# Altium PCB main board_PCB.PcbDoc
Units mil, origin at the board's own origin, x right, y up, seen from the top; angles counter-clockwise.
Board outline 5314.96 x 2480.31 mil, 2 copper layers (Top Layer, Bottom Layer); 89 components, 121 nets, 602 pads, 57 vias.
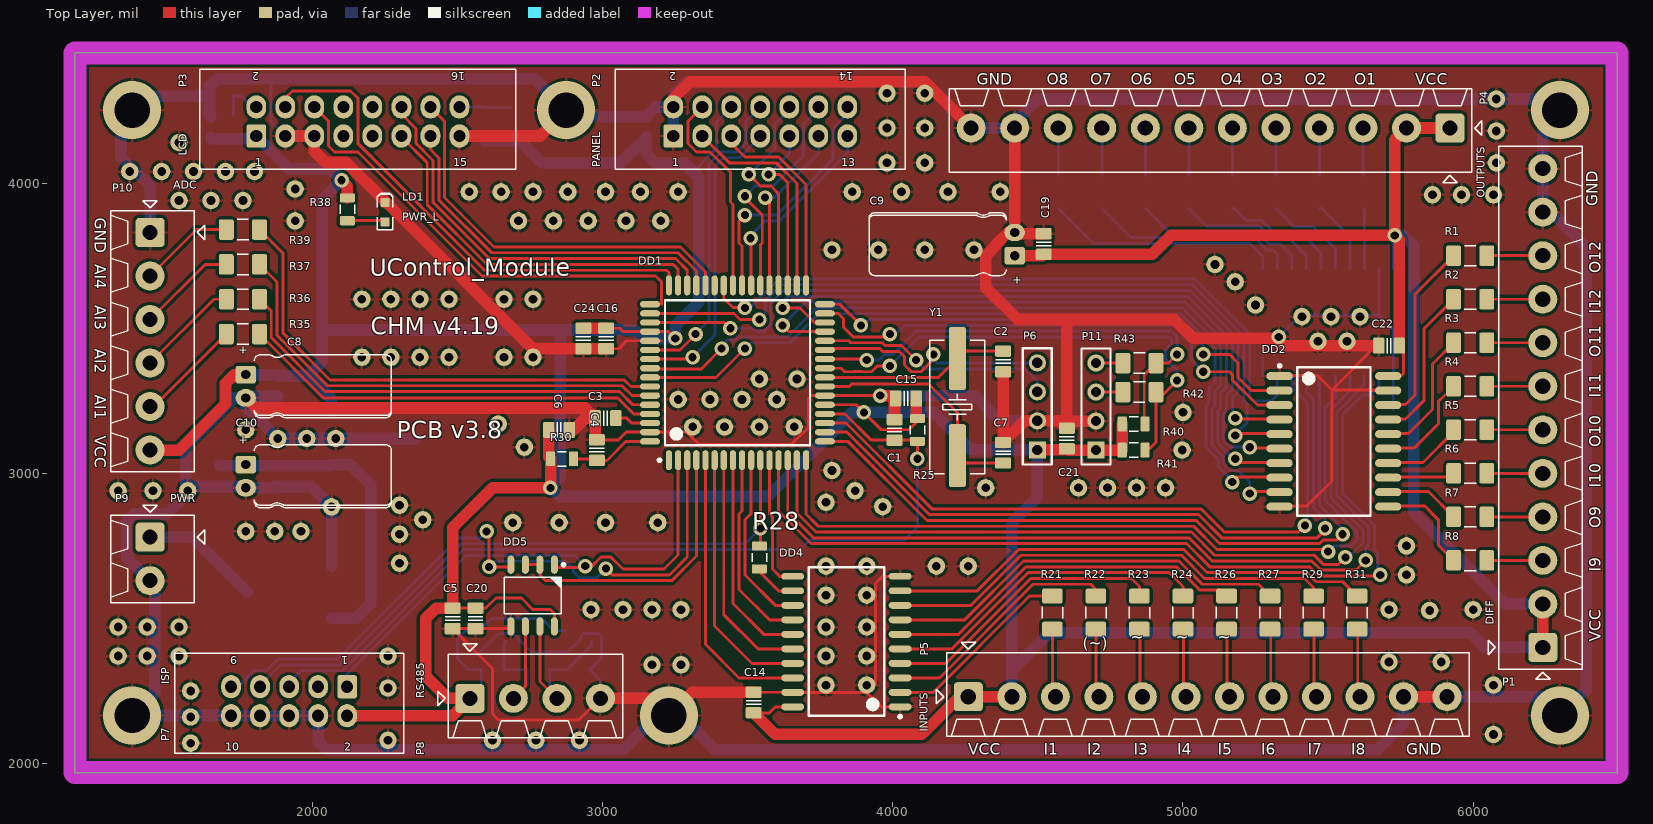
[diagram p0: Top Layer view]
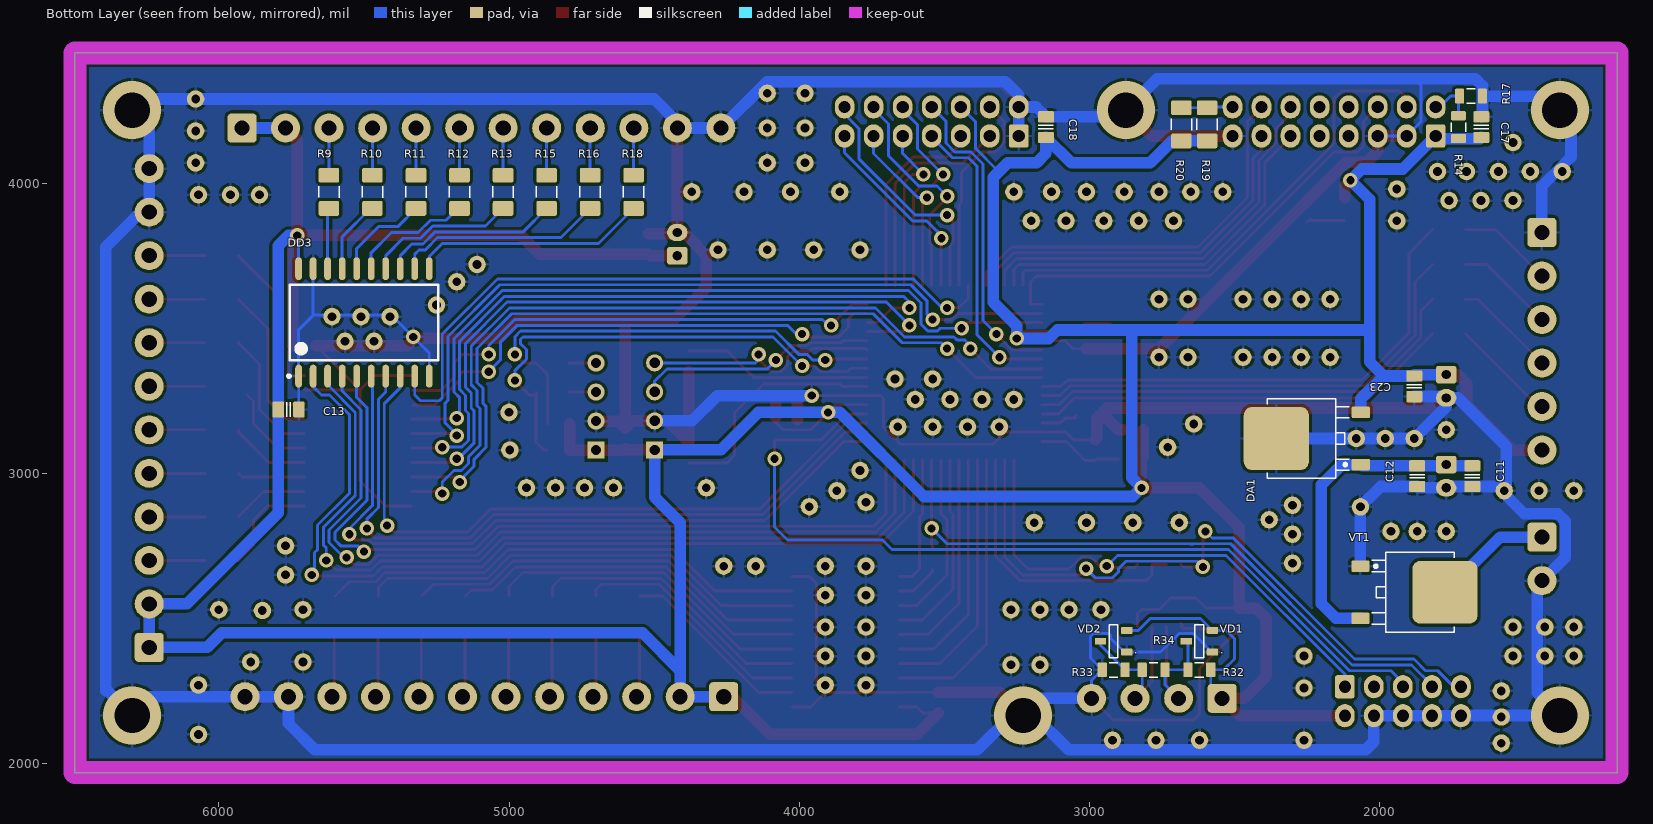
[diagram p1: Bottom Layer view, seen from below]

## Layer stack, top to bottom
Top Solder: solder mask 0.4, Solder Resist, Dk 3.5
Top Layer: signal copper 1.4
Dielectric1: dielectric 12.6, FR-4, Dk 4.8
Bottom Layer: signal copper 1.4
Bottom Solder: solder mask 0.4, Solder Resist, Dk 3.5

## Board outline
1181.1,1968.5 1181.1,4448.82 6496.06,4448.82 6496.06,1968.5

## Design rules (kind name [scope] priority, off if disabled: settings)
Clearance [All] p1: gap=10
PolygonConnect [All] p1: connectstyle=Relief reliefconductorwidth=10 reliefentries=4 polygonreliefangle="90 Angle" airgapwidth=10
RoutingVias [All] p1: holewidth=28 width=50 viastyle="Through Hole" minholewidth=28 minwidth=50 maxholewidth=28 maxwidth=50
SilkToSolderMaskClearance SilkscreenOverComponentPads [IsPad] p1: minsilkscreentomaskgap=10 clearancetoexposedcopper=TRUE
SolderMaskExpansion [All] p1: expansion=4
Width "Schematic Width Constraint_2" [InNet('NetP9_1')] p1: maxlimit=40 minlimit=10 preferedwidth=40
Width "Schematic Width Constraint_1" [InNet('GND')] p2: maxlimit=40 minlimit=10 preferedwidth=40
Width "Schematic Width Constraint" [InNet('VCC+12V')] p3: maxlimit=40 minlimit=10 preferedwidth=40
Width "Schematic Width Constraint_3" [InNet('VCC')] p4: maxlimit=40 minlimit=10 preferedwidth=40
Width [All] p5: maxlimit=10 minlimit=10 preferedwidth=10
29 further rules are at their usual default settings.

## Components (designator, comment, footprint, x,y, rotation, side; value= is the part's Value field where it differs from the comment)
C1 "C0805" CAPC2012X135N 4005.91,3149.61 r270 top
C2 "C0805" CAPC2012X135N 4379.92,3385.83 r90 top
C3 "C0805" CAPC2012X135N 3010,3190 r0 top
C4 "C0805" CAPC2012X135N 2980,3080 r270 top
C5 "C0805" CAPC2012X135N 2483.07,2500 r90 top
C6 "C0805" CAPC2012X135N 2850,3150 r180 top
C7 "C0805" CAPC2012X135N 4379.92,3070.87 r270 top
C8 "Cap Pol1" CAPAE200P550X1200_FLAT1 1770,3300 r270 top
C9 "Cap Pol1" CAPAE200P550X1200_FLAT1 4420,3790 r90 top
C10 "Cap Pol1" CAPAE200P550X1200_FLAT1 1770,2990 r270 top
C11 "C0805" CAPC2012X135N 1680,2990 r90 bottom
C12 "C0805" CAPC2012X135N 1870,2990 r90 bottom
C13 "C0805" CAPC2012X135N 5760,3220 r0 bottom
C14 "C0805" CAPC2012X135N 3520,2210 r270 top
C15 "C0805" CAPC2012X135N 4045.28,3257.87 r0 top
C16 "C0805" CAPC2012X135N 3011.81,3464.57 r90 top
C17 "C0805" CAPC2012X135N 1649.13,4192.91 r270 bottom
C18 "C0805" CAPC2012X135N 3149.61,4192.91 r270 bottom
C19 "C0805" CAPC2012X135N 4520,3790 r270 top
C20 "C0805" CAPC2012X135N 2561.81,2500 r90 top
C21 "C0805" CAPC2012X135N 4600,3120 r270 top
C22 "C0805" CAPC2012X135N 5710,3440 r0 top
C23 "C0805" CAPC2012X135N 1880,3300 r90 bottom
C24 "C0805" CAPC2012X135N 2933.07,3464.57 r90 top
DA1 "MC7805CD2TR4G" TO-252 2210,3120 r90 bottom
DD1 "ATmega128A-AU" 64A_N 3464.57,3346.46 r90 top
DD2 "MC74VHCT244ADT" 751D-04_M 5520,3110 r0 top
DD3 "MC74HC541ADW" 751D-05_N 5500,3520 r90 bottom
DD4 "MC74HC541ADW" 751D-05_N 3840,2420 r180 top
DD5 "MAX485" SOIC127P600X175-8AN 2758.66,2578.74 r270 top
LD1 "PWR_L" LED-0603-BLUE 2250,3900 r90 top
P1 "DIFF" 12P_PCB_ScrewTerm_90S_3.81MM 6240,2400 r0 top
P2 "PANEL" 14P_PCB_HEADER_BRD_MNT 3543.31,4212.6 r90 top
P3 "LCD" 16P_PCB_HEADER_BRD_MNT 2156.22,4212.6 r90 top
P4 "OUTPUTS" 12P_PCB_ScrewTerm_90S_3.81MM 5920,4190 r90 top
P5 "INPUTS" 12P_PCB_ScrewTerm_90S_3.81MM 4260,2230 r270 top
P6 "DEBUG" HDR1X4 4498.03,3080.71 r90 top
P7 "ISP" 10P_PCB_HEADER_BRD_MNT 1919.29,2214.57 r270 top
P8 "RS485" 4P_PCB_ScrewTerm_90S_3.81MM 2542.13,2224.41 r270 top
P9 "PWR" 2P_PCB_ScrewTerm_90S_3.81MM 1440,2780 r180 top
P10 "ADC" 6P_PCB_ScrewTerm_90S_3.81MM 1440,3830 r180 top
P11 "INT/I2C" HDR1X4 4700,3080 r90 top
R1 "Res2" RESC3216X70N 5990,3750 r0 top
R2 "Res2" RESC3216X70N 5990,3600 r0 top
R3 "Res2" RESC3216X70N 5990,3450 r0 top
R4 "Res2" RESC3216X70N 5990,3300 r0 top
R5 "Res2" RESC3216X70N 5990,3150 r0 top
R6 "Res2" RESC3216X70N 5990,3000 r0 top
R7 "Res2" RESC3216X70N 5990,2850 r0 top
R8 "Res2" RESC3216X70N 5990,2700 r0 top
R9 "Res2" RESC3216X70N 5620.63,3970 r90 bottom
R10 "Res2" RESC3216X70N 5470.63,3970 r90 bottom
R11 "Res2" RESC3216X70N 5320.63,3970 r90 bottom
R12 "Res2" RESC3216X70N 5170.63,3970 r90 bottom
R13 "Res2" RESC3216X70N 5020.63,3970 r90 bottom
R14 "Res2" RESC2012X70N 1727.87,4192.91 r90 bottom
R15 "Res2" RESC3216X70N 4870.63,3970 r90 bottom
R16 "Res2" RESC3216X70N 4720.63,3970 r90 bottom
R17 "Res2" RESC2012X70N 1684.41,4300 r0 bottom
R18 "Res2" RESC3216X70N 4570.63,3970 r90 bottom
R19 "Res2" RESC3216X70N 2594.02,4202.76 r90 bottom
R20 "Res2" RESC3216X70N 2682.6,4202.76 r90 bottom
R21 "Res2" RESC3216X70N 4550,2520 r270 top
R22 "Res2" RESC3216X70N 4700,2520 r270 top
R23 "Res2" RESC3216X70N 4850,2520 r270 top
R24 "Res2" RESC3216X70N 5000,2520 r270 top
R25 "Res2" RESC2012X70N 4084.65,3149.61 r270 top
R26 "Res2" RESC3216X70N 5150,2520 r270 top
R27 "Res2" RESC3216X70N 5300,2520 r270 top
R28 "Res2" RESC2012X70N 3540,2710 r270 top
R29 "Res2" RESC3216X70N 5450,2520 r270 top
R30 "Res2" RESC2012X70N 2860,3050 r180 top
R31 "Res2" RESC3216X70N 5600,2520 r270 top
R32 "Res2" RESC2012X70N 2620.87,2322.83 r180 bottom
R33 "Res2" RESC2012X70N 2916.14,2322.83 r180 bottom
R34 "Res2" RESC2012X70N 2778.35,2322.83 r0 bottom
R35 "Res2" RESC3216X70N 1760,3480 r0 top
R36 "Res2" RESC3216X70N 1760,3600 r0 top
R37 "Res2" RESC3216X70N 1760,3720 r0 top
R38 "Res2" RESC2012X70N 2120,3910 r90 top
R39 "Res2" RESC3216X70N 1760,3840 r0 top
R40 "Res2" RESC2012X70N 4830,3170 r180 top
R41 "Res2" RESC2012X70N 4830,3080 r180 top
R42 "Res2" RESC3216X70N 4850,3280 r180 top
R43 "Res2" RESC3216X70N 4850,3380 r180 top
VD1 "BAV99" SOT23-3 2620.87,2421.26 r0 bottom
VD2 "BAV99" SOT23-3 2916.14,2421.26 r0 bottom
VT1 "IRFU5505" TO-252 1920,2590 r270 bottom
Y1 "HC49/4H_SMX" CRYSTAL_HC49-US-SM 4222.44,3228.35 r90 top

## Footprints (in the part's own frame and the unit in brackets; to place one, negate y for a bottom-side part, rotate by r counter-clockwise, add the part's x,y. Pads: shape width x height; smd on the part's side, far side on the other; paste and mask are expansions set on the pad)
2P_PCB_ScrewTerm_90S_3.81MM [mil] "TERM BLOCK 2POS SIDE ENT STACKABLE 3.81MM"
  rrect25% 100x100 hole 52: 1(0,0)
  round 100 hole 52: 2(0,150)
  silkscreen extent -188,-110 136,226, body extent -152,-75 136,225, height 335
4P_PCB_ScrewTerm_90S_3.81MM [mil]
  rrect25% 100x100 hole 52: 1(0,0)
  round 100 hole 52: 2(0,150) 3(0,300) 4(0,450)
  silkscreen extent -188,-110 136,526, body extent -152,-75 136,525, height 335
6P_PCB_ScrewTerm_90S_3.81MM [mil] "TERM BLOCK 6POS SIDE ENT STACKABLE 3.81MM"
  rrect25% 100x100 hole 52: 1(0,0)
  round 100 hole 52: 2(0,150) 3(0,300) 4(0,450) 5(0,600) 6(0,750)
  silkscreen extent -188,-110 136,825, body extent -152,-75 136,825, height 335
10P_PCB_HEADER_BRD_MNT [mil] "HEADER BRD MNT 10POS 2.54MM"
  round 40 on Mech15: 0(0,0)
  rrect25% 80x68 hole 42: 1(-50,200)
  oval 80x68 hole 42: 2(50,200) 3(-50,100) 4(50,100) 5(-50,0) 6(50,0) 7(-50,-100) 8(50,-100) 9(-50,-200) 10(50,-200)
  silkscreen extent -165,-395 180,395, body extent -162,-394 178,394, height 390
12P_PCB_ScrewTerm_90S_3.81MM [mil]
  rrect25% 100x100 hole 52: 1(0,0)
  round 100 hole 52: 2(0,150) 3(0,300) 4(0,450) 5(0,600) 6(0,750) 7(0,900) 8(0,1050) 9(0,1200) 10(0,1350) 11(0,1500) 12(0,1650)
  silkscreen extent -188,-110 136,1726, body extent -152,-75 139,1725, height 335
14P_PCB_HEADER_BRD_MNT [mil] "HEADER BRD MNT 14POS 2.54MM"
  round 40 on Mech15: 0(0,0)
  rrect25% 80x68 hole 42: 1(-50,300)
  oval 80x68 hole 42: 2(50,300) 3(-50,200) 4(50,200) 5(-50,100) 6(50,100) 7(-50,0) 8(50,0) 9(-50,-100) 10(50,-100) 11(-50,-200) 12(50,-200) 13(-50,-300) 14(50,-300)
  silkscreen extent -165,-500 180,500, body extent -162,-494 178,494, height 390
16P_PCB_HEADER_BRD_MNT [mil] "HEADER BRD MNT 16POS 2.54MM"
  round 40 on Mech15: 0(0,0)
  rrect25% 80x68 hole 42: 1(-50,350)
  oval 80x68 hole 42: 2(50,350) 3(-50,250) 4(50,250) 5(-50,150) 6(50,150) 7(-50,50) 8(50,50) 9(-50,-50) 10(50,-50) 11(-50,-150) 12(50,-150) 13(-50,-250) 14(50,-250) 15(-50,-350) 16(50,-350)
  silkscreen extent -165,-545 180,545, body extent -162,-544 178,544, height 390
64A_N [mm] "Thin QFP, 64-Leads, Body 14x14mm, Pitch 0.8mm, IPC Medium Density"
  oval 1.75x0.55 smd: 1(-7.65,6) 2(-7.65,5.2) 3(-7.65,4.4) 4(-7.65,3.6) 5(-7.65,2.8) 6(-7.65,2) 7(-7.65,1.2) 8(-7.65,0.4) 9(-7.65,-0.4) 10(-7.65,-1.2) 11(-7.65,-2) 12(-7.65,-2.8) 13(-7.65,-3.6) 14(-7.65,-4.4) 15(-7.65,-5.2) 16(-7.65,-6) 33(7.65,-6) 34(7.65,-5.2) 35(7.65,-4.4) 36(7.65,-3.6) 37(7.65,-2.8) 38(7.65,-2) 39(7.65,-1.2) 40(7.65,-0.4) 41(7.65,0.4) 42(7.65,1.2) 43(7.65,2) 44(7.65,2.8) 45(7.65,3.6) 46(7.65,4.4) 47(7.65,5.2) 48(7.65,6)
  oval 0.55x1.75 smd: 17(-6,-7.65) 18(-5.2,-7.65) 19(-4.4,-7.65) 20(-3.6,-7.65) 21(-2.8,-7.65) 22(-2,-7.65) 23(-1.2,-7.65) 24(-0.4,-7.65) 25(0.4,-7.65) 26(1.2,-7.65) 27(2,-7.65) 28(2.8,-7.65) 29(3.6,-7.65) 30(4.4,-7.65) 31(5.2,-7.65) 32(6,-7.65) 49(6,7.65) 50(5.2,7.65) 51(4.4,7.65) 52(3.6,7.65) 53(2.8,7.65) 54(2,7.65) 55(1.2,7.65) 56(0.4,7.65) 57(-0.4,7.65) 58(-1.2,7.65) 59(-2,7.65) 60(-2.8,7.65) 61(-3.6,7.65) 62(-4.4,7.65) 63(-5.2,7.65) 64(-6,7.65)
  silkscreen extent -7.77,-6.35 6.35,6.95, body extent -7,-7 7,7, height 1.2
751D-04_M [mm] "SOIC, 20-Leads, Body 12.8x7.5mm, Pitch 1.27mm, IPC Low Density"
  oval 2.3x0.7 smd: 1(-4.75,5.715) 2(-4.75,4.445) 3(-4.75,3.175) 4(-4.75,1.905) 5(-4.75,0.635) 6(-4.75,-0.635) 7(-4.75,-1.905) 8(-4.75,-3.175) 9(-4.75,-4.445) 10(-4.75,-5.715) 11(4.75,-5.715) 12(4.75,-4.445) 13(4.75,-3.175) 14(4.75,-1.905) 15(4.75,-0.635) 16(4.75,0.635) 17(4.75,1.905) 18(4.75,3.175) 19(4.75,4.445) 20(4.75,5.715)
  silkscreen extent -4.87,-6.5 3.2,6.74, body extent -3.8,-6.5 3.8,6.5, height 2.65
751D-05_N [mm] "SOIC, 20-Leads, Body 12.8x7.5mm, Pitch 1.27mm, IPC Medium Density"
  oval 2x0.6 smd: 1(-4.7,5.715) 2(-4.7,4.445) 3(-4.7,3.175) 4(-4.7,1.905) 5(-4.7,0.635) 6(-4.7,-0.635) 7(-4.7,-1.905) 8(-4.7,-3.175) 9(-4.7,-4.445) 10(-4.7,-5.715) 11(4.7,-5.715) 12(4.7,-4.445) 13(4.7,-3.175) 14(4.7,-1.905) 15(4.7,-0.635) 16(4.7,0.635) 17(4.7,1.905) 18(4.7,3.175) 19(4.7,4.445) 20(4.7,5.715)
  silkscreen extent -4.82,-6.5 3.3,6.69, body extent -3.8,-6.5 3.8,6.5, height 2.65
CAPAE200P550X1200_FLAT1 [mil]
  round 20 on Mech15: 0(0,0)
  rrect25% 60x70 hole 31.5: 1(-40,0)
  oval 60x70 hole 31.5: 2(40,0)
  silkscreen extent -108,30 108,502, body extent -107,-10 107,502, height 216
CAPC2012X135N [mm] "Chip Capacitor, Body 2.0x1.2mm, EIA 0805, IPC Medium Density"
  round 0.254 on Mech15: 0(0,0)
  rrect25% 1x1.4 smd: 1(-0.9,0) 2(0.9,0)
  Top Layer pour cut-out: -0.675,0.7 -0.475,0.9 0.475,0.9 0.675,0.7 0.675,-0.7 0.475,-0.9 -0.475,-0.9 -0.675,-0.7
  silkscreen extent -0.15,-0.65 0.15,0.65, body extent -1.1,-0.72 1.1,0.73, height 1.34
CRYSTAL_HC49-US-SM [mm] "SMD Crystal HC49/US-SM package"
  round 0.508 on Mech15: 0(0,0)
  rrect25% 5.5x1.5 smd: 1(-4.25,0) 2(4.25,0)
  silkscreen extent -5.84,-2.41 5.84,2.41, body extent -6.4,-2.41 6.4,2.42, height 4.29
HDR1X4 [mm] "Connector; Header; 4 Position"
  rect 1.5x1.5 hole 0.9: 1(0,0)
  round 1.5 hole 0.9: 2(2.54,0) 3(5.08,0) 4(7.62,0)
  silkscreen extent -1.27,-1.27 8.89,1.27
LED-0603-BLUE [mm]
  round 0.254 on Mech15: 0(0,0)
  rrect25% 0.8x0.8 smd: A(-0.85,0) K(0.85,0)
  Top Layer pour cut-out: -0.5,0.5 0.5,0.5 0.5,-0.5 -0.5,-0.5
  silkscreen extent -1.55,-0.67 1.68,0.67, body extent -0.8,-0.4 0.8,0.4, height 0.75
RESC2012X70N [mm] "Chip Resistor, Body 2.0x1.2mm, EIA 0805, IPC Medium Density"
  round 0.254 on Mech15: 0(0,0)
  rrect25% 0.8x1.3 smd: 1(-1,0) 2(1,0)
  Top Layer pour cut-out: -0.725,0.65 -0.525,0.85 0.525,0.85 0.725,0.65 0.725,-0.65 0.525,-0.85 -0.525,-0.85 -0.725,-0.65
  silkscreen extent -0.38,-0.64 0.38,0.64, body extent -1.1,-0.67 1.1,0.68, height 0.69
RESC3216X70N [mm] "Chip Resistor, Body 3.2x1.6mm, EIA 1206, IPC Medium Density"
  round 0.508 on Mech15: 0(0,0)
  rrect25% 1.3x1.8 smd: 1(-1.45,0) 2(1.45,0)
  silkscreen extent -0.51,-0.89 0.51,0.89, body extent -1.62,-0.82 1.63,0.83, height 0.69
SOIC127P600X175-8AN [mm] "SOIC, 8-Leads, Body 4.9x3.9mm, Pitch 1.27mm, IPC Medium Density"
  round 1 on Mech15: 0(0,0)
  oval 1.6x0.6 smd: 1(-2.7,1.905) 2(-2.7,0.635) 3(-2.7,-0.635) 4(-2.7,-1.905) 5(2.7,-1.905) 6(2.7,-0.635) 7(2.7,0.635) 8(2.7,1.905)
  silkscreen extent -2.82,-2.5 1.6,2.83, body extent -3,-2.45 3,2.45, height 1.75
SOT23-3 [mm] "SOT23, 3 pin"
  round 0.5 on Mech15: 0(0,0)
  rrect25% 1x0.6 smd: 1(-1.15,0.95) 2(-1.15,-0.95) 3(1.15,0)
  silkscreen extent -0.38,-1.45 0.38,1.45, body extent -1.4,-1.45 1.4,1.45, height 1.29
TO-252 [mm] "D-PAK/TO-252-AA; 3 Leads (1 Cropped); Body 10.3 (inc. leads) x 6.7 mm (LxW max)"
  round 0.5 on Mech15: 0(0,0)
  rrect25% 1x1.6 smd: 1(-2.285,-3.7) 3(2.285,-3.7)
  rrect25% 5.5x5.7 smd: 4(0,3.7)
  silkscreen extent -3.5,-2.7 3.5,4.5, body extent -3.3,-3.95 3.3,5.76, height 2.31

## Part data
C1 C2 C3 C4 C5 C6 C7 C11 C12 C13 C14 C15 C16 C17 C18 C19 C20 C21 C22 C23 C24: "Ceramic Chip Capacitor - Standard"
C8 C9 C10: "Polarized Capacitor (Radial)"
DA1: library part µA78M05CKTPR, "Positive-Voltage Regulator"
DD1: "8-bit AVR Microcontroller, 128KB Flash, 4KB EEPROM, 4KB SRAM, 64-pin TQFP, Industrial Grade (-40°C to 85°C)"
DD2: "vit"
DD3 DD4: "Octal 3-State Non-Inverting Buffer/Line Driver/Line Receiver"
DD5: library part ST485
LD1: library part LED, "APT1608QBC/D"
P1 P4 P5: library part "Header 12", "Header, 12-Pin"
P2: library part "Header 14", "Header, 14-Pin"
P3: library part "Header 16", "Header, 16-Pin"
P6 P11: library part "Header 4", "Header, 4-Pin"
P7: library part "Header 5X2", "Header, 5-Pin, Dual row"
P8: library part MHDR1X4, "Header, 4-Pin"
P9: library part "Header 2H", "Header, 2-Pin, Right Angle"
P10: library part "Header 6", "Header, 6-Pin"
R1 R2 R3 R4 R5 R6 R7 R8 R9 R10 R11 R12 R13 R14 R15 R16 R17 R18 R19 R20 R21 R22 R23 R24 R25 R26 R27 R28 R29 R30 R31 R32 R33 R34 R35 R36 R37 R38 R39 R40 R41 R42 R43: "Resistor"
VD1 VD2: "Silicon Switching Diode Array for High-Speed Switching"
VT1: "HEXFET Power MOSFET"
Y1: "Surface Mount Quartz Crystal"

## Free pads (board coordinates)
  round 60 hole 30: 1(3260,3970) 2(2880,3970) 3(3010,3970) 4(3130,3970) 5(3860,3970) 6(4030,3970) 7(4190,3970) 8(4370,3970) 9(3790,3770) 10(3950,3770) 11(4110,3770) 12(4280,3770) 13(5410,3540) 14(5510,3540) 15(5610,3540) 16(5860,3960) 17(5960,3960) 18(6070,3960) 19(4320,2950) 20(4640,2950) 21(4740,2950) 22(4840,2950) 23(4940,2950) 25(5000,3210) 26(4997.05,3080.04) 28(5710,2530) 29(5850.04,2527.05) 31(6000,2530) 32(5770,2750) 33(5770,2650) 34(5710,2350) 36(5890,2350) 37(6070,2100) 38(2960,2530) 39(3070,2530) 40(3170,2530) 41(3270,2530) 43(3270,2340) 44(3170,2340) 47(3190,2830) 49(3010,2830) 51(2850,2830) 53(2690,2830) 55(2730,3090) 56(2640,3170) 58(2260,2260) 59(2260,2370) 61(2300,2690) 62(2300,2790) 63(2300,2890) 64(2380,2840) 66(2760,3400) 67(2660,3400) 69(2470,3400) 70(2370,3400) 71(2270,3400) 72(2170,3400) 73(2760,3600) 74(2660,3600) 76(2470,3600) 77(2370,3600) 78(2270,3600) 79(2170,3600) 80(1940,3980) 81(1940,3870) 83(1800,4040) 84(1700,4040) 85(1590,4040) 86(1480,4040) 87(1370,4040) 88(1540,4140) 89(1540,3940) 90(1650,3940) 91(1760,3940) 92(2760,3970) 93(2650,3970) 94(2710,3870) 95(2830,3870) 96(2950,3870) 97(3080,3870) 98(3200,3870) 100(1960,2800) 101(1870,2800) 102(1770,2800) 104(1330,2470) 105(1430,2470) 106(1540,2470) 107(1330,2370) 108(1430,2370) 109(1540,2370) 110(1580,2070) 111(1580,2160) 112(1580,2250) 113(2260,2080) 114(2620,2080) 115(2770,2080) 116(2920,2080) 117(5110,3720) 118(2080,3120) 119(1980,3120) 120(1880,3120) 121(1770,3150) 123(1450,2940) 124(1330,2940) 125(1570,2940) 126(2065.67,2884.33) 127(3260,3254.69) 128(3370,3254.69) 129(3480,3254.69) 130(3600,3254.69) 132(3310,3160) 133(3420,3160) 134(3540,3160) 135(3660,3160) 136(3540,3324.69) 137(3670,3324.69) 139(4110,4070) 140(4110,4190) 141(4110,4310) 142(3980,4310) 143(3980,4190) 144(3980,4070) 145(2540,3970) 147(6070,2270) 148(5465,3455) 149(5565,3455) 150(5180,3660) 151(5250,3580) 152(6080,4290) 153(6080,4180) 154(6080,4070) 155(4260,2680) 156(4150,2680) 157(3770,2680) 158(3910,2680) 161(3770,2580) 162(3770,2470) 163(3770,2370) 164(3770,2270) 165(3910,2580) 166(3910,2470) 167(3910,2370) 168(3910,2270) 174(3770,2900) 175(3790,3010) 176(3870,2940) 177(3965,2885)

## Via types
v1: diameter 50, hole 28, Top Layer to Bottom Layer, 51 vias
v2: diameter 200, hole 122.05, Top Layer to Bottom Layer, 6 vias

## Nets (pads, with @x,y where several pads share a name; then routed paths per layer and width w, separated by ;. In a path a pad name is that pad's centre, name@x,y a point inside that pad or via, vN(x,y) a via of type N, cw(c..) or ccw(c..) an arc to the next point about the centre after c; other vN are vias at no path point)
A: DD5.6 P8.2 R32.1 R34.1 VD1.3 | length 562.7
  Top Layer w10: P8.2 2733.66,2265.94 DD5.6
  Bottom Layer w10: VD1.3 2660.24,2415.35 R32.1 R34.1 2738.98,2271.26 P8.2
ADC0: DD1.61 R35.2 | length 1460.3
  Top Layer w10: R35.2 2037.09,3260 3051.72,3260 3106.99,3204.72 DD1.61
ADC1: DD1.60 R36.2 | length 1550.7
  Top Layer w10: R36.2 1857.68,3559.41 1857.68,3467.69 2043.43,3281.94 3058.06,3281.94 3103.78,3236.22 DD1.60
ADC2: DD1.59 R37.2 | length 1641.1
  Top Layer w10: R37.2 1877.68,3659.41 1877.68,3475.98 2051.72,3301.94 3066.34,3301.94 3100.57,3267.72 DD1.59
ADC3: DD1.58 R39.2 | length 1731.5
  Top Layer w10: R39.2 1897.68,3759.41 1897.68,3484.26 2060,3321.94 3074.63,3321.94 3097.36,3299.21 DD1.58
AREF: C3.2 DD1.62 | length 139
  Top Layer w10: C3.2 C3.2@3055.43,3190 ; C3.2@3045.43,3200 C3.2@3055.43,3190 ; DD1.62 3100,3173.23 3083.23,3190 C3.2@3055.43,3190
AVCC: C4.2 DD1.64 R30.1 | length 293.5
  Top Layer w10: R30.1 2974.57,3050 C4.2 3014.57,3044.57 3080.24,3110.24 DD1.64
B: DD5.7 P8.3 R33.2 R34.2 VD2.3 | length 573.3
  Top Layer w10: DD5.7 2783.66,2282.87 P8.3
  Bottom Layer w10: P8.3 2817.72,2248.82 R34.2 R33.2 2961.42,2407.48 VD2.3
B_LIG: P3.16 R19.2 R20.2 | length 176.4
  Bottom Layer w10: P3.16 R19.2@2594.02,4262.6 ; R19.2 R20.2
BPR: DD1.55 P2.7 | length 1040.9
  Top Layer w10: DD1.55 3303.7,3393.7 v1(3310,3400)
  Bottom Layer w10: v1(3310,3400) 3386.57,3476.57 3386.57,4057.69 3416.47,4087.6 3471.89,4087.6 3543.31,4159.02 P2.7
BUT1: DD1.54 P2.8 | length 1108.7
  Top Layer w10: DD1.54 3163.39,3424.7 3266.57,3424.7 3320,3478.13 v1(3320,3480) v1@3300,3480
  Bottom Layer w10: v1(3320,3480) 3366.57,3526.57 3366.57,4065.98 3408.19,4107.6 3463.6,4107.6 3494.31,4138.3 3494.31,4213.6 P2.8
BUT2: DD1.35 P2.9 | length 594.7
  Top Layer w10: v1(3571.5,4030) 3610,4030 3637.8,4002.2 DD1.35
  Bottom Layer w10: v1(3571.5,4030) 3643.31,4101.81 P2.9
BUT3: DD1.36 P2.10 | length 744.8
  Top Layer w10: v1@3512.13,4022.13 3544.25,3990 3580,3990 3606.3,3963.7 DD1.36
  Bottom Layer w10: v1@3490,4015.75 v1(3504.25,4030) 3592.31,4118.06 3592.31,4201.6 3643.31,4252.6 P2.10
BUT4: DD1.37 P2.11 | length 615
  Top Layer w10: v1(3560,3950) 3574.8,3935.2 DD1.37
  Bottom Layer w10: v1(3560,3950) 3590.66,3950 3743.31,4102.65 P2.11
BUT5: DD1.38 P2.12 | length 784.5
  Top Layer w10: v1(3490,3955) 3490,3950 3550,3890 3550,3793.43 3543.31,3786.74 DD1.38
  Bottom Layer w10: v1(3490,3955) 3525,3990 3588.07,3990 3692.31,4094.24 3692.31,4204.12 3743.31,4255.12 P2.12
BUT6: DD1.39 P2.13 | length 690.3
  Top Layer w10: v1@3500,3810 3511.81,3798.19 DD1.39
  Bottom Layer w10: v1@3500,3810 3560,3870 3608.28,3870 3843.31,4105.02 P2.13
  other v1: 3510,3810
BUT7: DD1.40 P2.14 | length 838.3
  Top Layer w10: DD1.40 3480.32,3783.12 3470,3793.43 3470,3870 v1(3490,3890)
  Bottom Layer w10: v1(3490,3890) 3600,3890 3794.31,4084.31 3794.31,4188.89 3843.31,4237.89 P2.14
CONTR: P3.2 R14.2 R17.2 | length 161.6
  Bottom Layer w10: R17.2 1754.41,4300 1791.81,4262.6 P3.2 ; R14.2 R17.2@1727.87,4295.91
D4: DD1.47 P3.11 | length 1286
  Top Layer w10: P3.11 2306.22,4159.02 2395.22,4070.02 2395.22,3925.84 2601.06,3720 3243.05,3720 3259.84,3703.21 DD1.47
D5: DD1.46 P3.12 | length 1399.1
  Top Layer w10: P3.12 2306.22,4237.89 2357.22,4186.89 2357.22,4136.3 2415.22,4078.3 2415.22,3934.13 2609.35,3740 3251.34,3740 3291.34,3700 DD1.46
D6: DD1.45 P3.13 | length 1270.7
  Top Layer w10: P3.13 2406.22,4115.59 2435.22,4086.59 2435.22,3942.41 2617.63,3760 3259.62,3760 3322.83,3696.79 DD1.45
D7: DD1.44 P3.14 | length 1383.8
  Top Layer w10: P3.14 2455.22,4213.6 2455.22,3950.7 2625.92,3780 3267.91,3780 3354.33,3693.58 DD1.44
DIR_ROT: DD1.29 DD2.7 | length 2375.2
  Top Layer w10: v1(3620,3510) 3641.81,3488.19 DD1.29 ; v1(5180,3050) 5193.11,3036.89 DD2.7@5335.59,3036.89
  Bottom Layer w10: v1(3620,3510) 3700,3590 5006.86,3590 5150,3446.86 5150,3296.86 5130,3276.86 5130,3224.85 5120,3214.85 5120,3105.15 5175.15,3050 v1(5180,3050)
DIR_VERT: DD1.30 DD2.6 | length 2369.7
  Top Layer w10: v1(3620,3570) 3680,3570 3730.32,3519.68 DD1.30 ; v1(5230,3090) 5233.11,3086.89 DD2.6@5335.59,3086.89
  Bottom Layer w10: v1(3620,3570) 3620,3590 3640,3610 5015.15,3610 5170,3455.15 5170,3288.58 5150,3268.58 5150,3216.57 5140,3206.57 5140,3113.43 5163.43,3090 v1(5230,3090)
E: DD1.49 P3.6 | length 1612.8
  Top Layer w10: P3.6 2055.22,4213.6 2055.22,4127.84 2075.47,4107.6 2156.9,4107.6 2584.5,3680 3182.52,3680 3202.52,3660 3202.52,3613.32 3202.68,3613.16 3202.68,3582.68 DD1.49
GND: C1.1 C2.1 C3.1 C4.1 C5.1 C6.1 C7.1 C8.2 C9.2 C10.2 C11.1 C12.1 C13.1 C14.1 C15.1 C16.1 C17.1 C18.1 C19.1 C20.1 C21.1 C22.1 C23.1 C24.1 DA1.4 DD1.22 DD1.53 DD1.63 DD2.1 DD2.10 DD2.19 DD3.1 DD3.10 DD3.19 DD4.1 DD4.10 DD4.19 DD5.5 LD1.K P1.11 P1.12 P2.1 P2.2 P3.3 P3.5 P3.15 P4.11 P4.12 P5.11 P5.12 P6.2 P7.4 P7.6 P7.8 P7.10 P8.4 P9.2 P10.1 P11.2 pad.1 pad.2 pad.3 pad.4 pad.5 pad.6 pad.7 pad.8 pad.9 pad.10 pad.11 pad.12 pad.13 pad.14 pad.15 pad.16 pad.17 pad.18 pad.19 pad.20 pad.21 pad.22 pad.23 pad.25 pad.26 pad.28 pad.29 pad.31 pad.32 pad.33 pad.34 pad.36 pad.37 pad.38 pad.39 pad.40 pad.41 pad.43 pad.44 pad.47 pad.49 pad.51 pad.53 pad.55 pad.56 pad.58 pad.59 pad.61 pad.62 pad.63 pad.64 pad.66 pad.67 pad.69 pad.70 pad.71 pad.72 pad.73 pad.74 pad.76 pad.77 pad.78 pad.79 pad.80 pad.81 pad.83 pad.84 pad.85 pad.86 pad.87 pad.88 pad.89 pad.90 pad.91 pad.92 pad.93 pad.94 pad.95 pad.96 pad.97 pad.98 pad.100 pad.101 pad.102 pad.104 pad.105 pad.106 pad.107 pad.108 pad.109 pad.110 pad.111 pad.112 pad.113 pad.114 pad.115 pad.116 pad.117 pad.118 pad.119 pad.120 pad.121 pad.123 pad.124 pad.125 pad.126 pad.127 pad.128 pad.129 pad.130 pad.132 pad.133 pad.134 pad.135 pad.136 pad.137 pad.139 pad.140 pad.141 pad.142 pad.143 pad.144 pad.145 pad.147 pad.148 pad.149 pad.150 pad.151 pad.152 pad.153 pad.154 pad.155 pad.156 pad.157 pad.158 pad.161 pad.162 pad.163 pad.164 pad.165 pad.166 pad.167 pad.168 pad.174 pad.175 pad.176 pad.177 R17.1 R33.1 VD1.1 VD2.1 VT1.1 | length 32296.3
  Top Layer w10: DD5.5@2678.74,2477.36 DD5.5@2683.66,2482.28 ; DD5.5 2675.79,2464.57 C20.1 C5.1 2620,2327.64 2620,2170 2640,2150 2917.72,2150 P8.4 ; C4.1 3054.53,3115.43 3080.83,3141.73 DD1.63 3289.98,3141.73 3331.72,3100 3650,3100 3710,3160 3710,3257.72 3720,3267.72 DD1.22 v1(3956.69,3267.72) ; C16.1 3055.12,3429.13 3082.68,3456.69 DD1.53 3201.44,3456.69 ; C14.1 3654.53,2245.43 DD4.19 pad.168@3910,2245 ; DD4.1 3960,2195 pad.168@3910,2245 ; DD4.10 3965,2645 3940,2620 3940,2275 pad.168@3910,2245 ; C7.1 C7.1@4403.7,3106.3 ; DD2.10@5335.59,2886.89 5426.89,2886.89 5513.11,2973.11 5513.11,3286.89 ; DD2.1@5335.59,3336.89 5463.11,3336.89 5513.11,3286.89 ; C22.1 5666.22,3440 5513.11,3286.89 ; DD2.19@5705.67,3286.89 5513.11,3286.89 ; P5.11@5751.97,2244.09 P5.11@5760,2244.09
  Top Layer w40: C8.2 1805,3225 2939.57,3225 C3.1 ; P3.3 P3.5 2006.22,4110 2043.62,4072.6 2115.18,4072.6 2250,3937.78 LD1.K 2254.69,3933.46 2759.02,3429.13 C24.1 C16.1 ; P3.15 2784.65,4162.6 v2(2874.02,4251.97) ; C6.1 2900,3150 2940,3190 C3.1 ; C4.1 2974.57,3120.87 C3.1 ; P8.4 3169.29,2224.41 v2(3228.35,2165.35) 3308.43,2245.43 C14.1 ; P2.2 3243.31,4291.97 3301.34,4350 4110.63,4350 P4.12@4270.63,4190 ; v1(3956.69,3267.72) 3989.65,3267.72 4002.37,3255 4005.91,3255 C1.1 ; C2.1 C7.1 4454.33,3180.71 P6.2 4574.72,3180.71 C21.1 ; P4.11 C9.2 ; C19.1 4424.57,3825.43 C9.2 ; P11.2 4624.57,3180 C21.1 ; C22.1@5666.22,3440 5350,3440 5325,3465 5035,3465 4970,3530 4600,3530 ; P5.11 P5.12 ; C9.2 4396.97,3830 4355,3788.03 4355,3785 4320,3750 4320,3640 4430,3530 4600,3530 ; C21.1 4600,3530
  Bottom Layer w10: 1870.43,4350.39 1857.22,4337.19 1857.22,4211.6 P3.3 P3.5 ; VD1.1 2577.76,2383.86 2641.97,2448.07 2690.31,2448.07 2754.52,2383.86 VD2.1 2878.74,2383.86 2926.73,2431.85 2926.73,2442.32 2932.48,2448.07 2985.59,2448.07 2996.1,2437.55 2996.1,2363.43 R33.1 2992.13,2286.22 P8.4 ; P2.1@3248.03,4153.54 P2.2@3248.03,4253.54 ; DD3.10 5275,3415 v1(5330,3470) 5405,3545 5675,3545 ; DD3.19 5675,3545 ; C13.1 5724.57,3334.53 DD3.1 5725,3495 5675,3545
  Bottom Layer w40: P10.1 1440,3990 1340,4090 1340,4214.02 1425.98,4300 R17.1 ; C17.1 1645.04,4232.44 R17.1 ; C12.1@1865.43,2950 C10.2 1765.43,2954.57 C11.1 pad.125@1594.57,2954.57 ; C12.1 1995.43,2954.57 pad.126 VT1.1 ; C23.1 1774.57,3264.57 C8.2 ; DA1.4 pad.120 1770,3230 C8.2 ; P8.4 3169.29,2224.41 v2(3228.35,2165.35) ; P2.1 P2.2 ; v1@3953.98,3265 v1(3956.69,3267.72) 4282.28,3267.72 4369.29,3180.71 P6.2 ; pad.125@1594.57,2954.57 1563.15,2954.57 1563.15,3093.15 1730,3260 C8.2 ; pad.125@1594.57,2954.57 1500,2860 1384.9,2860 1360,2835.1 1360,2710 P9.2 1456.69,2613.31 1456.69,2244.09 1377.95,2165.35 1718.5,2165.35 P7.10 P7.8 P7.6 P7.4 2019.29,2075.2 2047.24,2047.24 3070.87,2047.24 3188.98,2165.35 v2(3228.35,2165.35) ; R17.1 1645.04,4335.04 1670,4360 2765.98,4360 v2(2874.02,4251.97) 2897.64,4228.35 C18.1 3183.86,4262.6 P2.2 ; v2(3228.35,2165.35) 3267.72,2165.35 3385.83,2047.24 5669.29,2047.24 5760,2137.95 P5.11 P5.12 6234.57,2230 v2(6299.21,2165.35) 6383.86,2250 6390,2250 6390,3780 6270,3900 P1.11 P1.12 6240,4192.76 v2(6299.21,4251.97) 6261.18,4290 4500,4290 4420,4210 P4.11 P4.12 4110,4350 3290,4350 3243.31,4303.31 P2.2
  other v2: 1378.35,2165.35 1377.95,4251.97
IN_1: DD1.5 DD4.18 | length 983.1
  Top Layer w10: DD1.5 3354.33,2410.67 3470,2295 DD4.18
IN_2: DD1.6 DD4.17 | length 893.7
  Top Layer w10: DD1.6 3385.83,2474.17 3515,2345 DD4.17
IN_3: DD1.7 DD4.16 | length 819
  Top Layer w10: DD1.7 3417.32,2512.68 3535,2395 DD4.16
IN_4: DD1.8 DD4.15 | length 744.2
  Top Layer w10: DD1.8 3448.82,2551.18 3555,2445 DD4.15
IN_5: DD1.9 DD4.14 | length 678
  Top Layer w10: DD1.9 3480.32,2870 3470,2859.68 3470,2600 3575,2495 DD4.14
IN_6: DD1.10 DD4.13 | length 612.8
  Top Layer w10: DD1.10 3511.81,2861.5 3490,2839.68 3490,2650 3595,2545 DD4.13
IN_7: DD1.11 P7.7 R28.1 | length 2260.2
  Top Layer w10: R28.1@3540,2739.37 R28.1 3543.31,2752.68 v1(3543.31,2810) DD1.11
  Bottom Layer w10: P7.7 1819.29,2269.29 1889.57,2339.57 2094.75,2339.57 2512.35,2757.17 2641.4,2757.17 2641.72,2756.85 2653.42,2756.85 2653.73,2757.17 3490.47,2757.17 v1(3543.31,2810)
IN_8: DD1.12 DD4.11 | length 459.8
  Top Layer w10: DD1.12 3574.8,2860 3584.8,2850 3584.8,2670.2 3610,2645 DD4.11
INT0/SCL: DD1.25 R41.1 R42.1 | length 1744.7
  Top Layer w10: DD1.25 3821.23,3362.2 3833.43,3350 3866.57,3350 3866.84,3350.28 3893.16,3350.28 3893.43,3350 3926.57,3350 3946.57,3370 v1(3990,3370) ; R41.1 4880,3080 4907.09,3107.09 R42.1@4907.09,3270 ; R42.1 R42.1@4907.09,3270 ; v1(4980,3320) 4930,3270 R42.1@4907.09,3270
  Bottom Layer w10: v1(3990,3370) 4090,3470 4951.72,3470 4960,3461.72 4960,3446.57 4940,3426.57 4940,3393.43 4980,3353.43 v1(4980,3320) v1@4980,3310
INT1/SDA: DD1.26 R40.1 R43.1 | length 1638.8
  Top Layer w10: DD1.26 3906.3,3393.7 v1(3910,3390) ; R40.1 4866.5,3172.87 4866.5,3339.41 R43.1 4950,3380 v1(4980,3410)
  Bottom Layer w10: v1(3910,3390) 3953.43,3390 3973.43,3410 4001.72,3410 4081.72,3490 4960,3490 4980,3470 v1(4980,3410)
LD1: DD1.34 P2.3 | length 745.1
  Top Layer w10: P2.3 3435.91,4070 3598.28,4070 3669.29,3998.99 DD1.34
LD2: DD1.41 P2.4 | length 726.8
  Top Layer w10: P2.4 3294.31,4213.6 3294.31,4136.3 3323.01,4107.6 3370.02,4107.6 3440,4037.62 3440,3934.61 3448.82,3925.79 DD1.41
LD3: DD1.33 P2.5 | length 689.9
  Top Layer w10: P2.5 3443.31,4136.69 3490,4090 3606.57,4090 3700.79,3995.78 DD1.33
MOW_EN: DD1.50 DD2.5 | length 2726.1
  Top Layer w10: DD1.50 3452.25,3551.18 3473.43,3530 v1(3540,3530) ; v1(5180,3130) 5186.89,3136.89 DD2.5@5335.59,3136.89
  Bottom Layer w10: v1(3540,3530) 3560,3550 3560,3594.85 3615.15,3650 5031.72,3650 5210,3471.72 5210,3251.72 5220,3241.72 5220,3173.43 5180,3133.43 v1(5180,3130)
MOW_ON: DD1.51 DD2.4 | length 2651.9
  Top Layer w10: DD1.51 3163.39,3520 3420,3520 v1(3440,3500) ; v1(5180,3190) 5183.11,3186.89 DD2.4@5335.59,3186.89
  Bottom Layer w10: v1(3440,3500) 3513.43,3500 3523.43,3490 3556.57,3490 3580,3513.43 3580,3586.57 3623.43,3630 5023.43,3630 5190,3463.43 5190,3280.29 5170,3260.29 5170,3200 v1(5180,3190)
NetDD2_11: DD2.11 R8.1 | length 355.7
  Top Layer w10: DD2.11@5705.67,2886.89 5833.11,2886.89 5880,2840 5880,2752.91 R8.1
NetDD2_12: DD2.12 R7.1 | length 263.2
  Top Layer w10: DD2.12@5705.67,2936.89 5846.02,2936.89 R7.1
NetDD2_13: DD2.13 R6.1 | length 232.7
  Top Layer w10: DD2.13@5705.67,2986.89 5919.8,2986.89 R6.1
NetDD2_14: DD2.14 R5.1 | length 278.2
  Top Layer w10: DD2.14@5705.67,3036.89 5826.89,3036.89 5932.91,3142.91 R5.1
NetDD2_15: DD2.15 R4.1 | length 318.2
  Top Layer w10: DD2.15@5705.67,3086.89 5796.89,3086.89 5880,3170 5880,3247.09 5902.91,3270
NetDD2_16: DD2.16 R3.1 | length 449
  Top Layer w10: DD2.16@5705.67,3136.89 5776.89,3136.89 5860,3220 5860,3377.09 R3.1
NetDD2_17: DD2.17 R2.1 | length 543.1
  Top Layer w10: DD2.17@5705.67,3186.89 5766.89,3186.89 5830,3250 5830,3497.09 R2.1
NetDD2_18: DD2.18 R1.1 | length 643.1
  Top Layer w10: DD2.18@5705.67,3236.89 5766.89,3236.89 5800,3270 5800,3617.09 R1.1
NetDD3_11: DD3.11 R18.1 | length 815.2
  Bottom Layer w10: R18.1 4691.22,3792.32 5230,3792.32 5275,3747.32 DD3.11
NetDD3_12: DD3.12 R16.1 | length 719.7
  Bottom Layer w10: R16.1 4821.22,3812.32 5246.11,3812.32 5288.43,3770 5310,3770 5325,3755 DD3.12
NetDD3_13: DD3.13 R15.1 | length 616.8
  Bottom Layer w10: R15.1 4951.22,3832.32 5254.39,3832.32 5296.72,3790 5335,3790 5375,3750 DD3.13
NetDD3_14: DD3.14 R13.1 | length 516.8
  Bottom Layer w10: R13.1 5081.22,3852.32 5262.68,3852.32 5305,3810 5365,3810 5425,3750 DD3.14
NetDD3_15: DD3.15 R12.1 | length 422.7
  Bottom Layer w10: R12.1 5177.09,3912.91 5217.68,3872.32 5270.96,3872.32 5313.28,3830 5405,3830 5475,3760 DD3.15
NetDD3_16: DD3.16 R11.1 | length 331.5
  Bottom Layer w10: R11.1 5383.54,3850 5450,3850 5525,3775 DD3.16
NetDD3_17: DD3.17 R10.1 | length 254.9
  Bottom Layer w10: R10.1 5477.09,3912.91 5575,3815 DD3.17
NetDD3_18: DD3.18 R9.1 | length 209.7
  Bottom Layer w10: R9.1 5625,3908.54 DD3.18
NetDD4_2: DD4.2 R21.1 | length 662.5
  Top Layer w10: DD4.2 4138.98,2245 4471.07,2577.09 R21.1
NetDD4_3: DD4.3 R22.1 | length 838.9
  Top Layer w10: DD4.3 4160.7,2295 4483.38,2617.68 4682.32,2617.68 4700,2600 R22.1
NetDD4_4: DD4.4 R23.1 | length 990.6
  Top Layer w10: DD4.4 4182.41,2345 4475.09,2637.68 4822.32,2637.68 4850,2610 R23.1
NetDD4_5: DD4.5 R24.1 | length 1136.4
  Top Layer w10: DD4.5 4204.13,2395 4466.81,2657.68 4952.32,2657.68 5000,2610 R24.1
NetDD4_6: DD4.6 R26.1 | length 1263
  Top Layer w10: DD4.6 4225.85,2445 4458.52,2677.68 4977.9,2677.68 5057.9,2597.68 5129.41,2597.68 R26.1
NetDD4_7: DD4.7 R27.1 | length 1409.2
  Top Layer w10: DD4.7 4247.56,2495 4450.24,2697.68 4986.18,2697.68 5066.18,2617.68 5260,2617.68 5300,2577.68 R27.1
NetDD4_8: DD4.8 R29.1 | length 1572.2
  Top Layer w10: DD4.8 4269.28,2545 4441.96,2717.68 4994.47,2717.68 5074.47,2637.68 5419.19,2637.68 5450,2606.86 R29.1
NetDD4_9: DD4.9 R31.1 | length 1700.6
  Top Layer w10: DD4.9 4290.99,2595 4433.67,2737.68 5002.75,2737.68 5082.75,2657.68 5427.47,2657.68 5458.86,2626.29 5550.8,2626.29 R31.1
NetDD4_12: DD4.12 R28.2 | length 152.1
  Top Layer w10: R28.2 3540,2660.63 3605.63,2595 DD4.12
NetLD1_A: LD1.A R38.1 | length 140
  Top Layer w10: R38.1 2245.91,3870.63 LD1.A ; LD1.A@2237.56,3877.2 LD1.A@2243.46,3871.3
NetP1_3: P1.3 R8.2 | length 192.9
  Top Layer w10: R8.2 P1.3
NetP1_4: P1.4 R7.2 | length 192.9
  Top Layer w10: R7.2 P1.4
NetP1_5: P1.5 R6.2 | length 192.9
  Top Layer w10: R6.2 P1.5
NetP1_6: P1.6 R5.2 | length 192.9
  Top Layer w10: R5.2 P1.6
NetP1_7: P1.7 R4.2 | length 192.9
  Top Layer w10: R4.2 P1.7
NetP1_8: P1.8 R3.2 | length 192.9
  Top Layer w10: R3.2 P1.8
NetP1_9: P1.9 R2.2 | length 192.9
  Top Layer w10: R2.2 P1.9
NetP1_10: P1.10 R1.2 | length 192.9
  Top Layer w10: R1.2 P1.10
NetP4_3: P4.3 R9.2 | length 163.2
  Bottom Layer w10: P4.3 5620.63,4189.37 R9.2
NetP4_4: P4.4 R10.2 | length 163.2
  Bottom Layer w10: P4.4 5470.63,4189.37 R10.2
NetP4_5: P4.5 R11.2 | length 163.2
  Bottom Layer w10: P4.5 5320.63,4189.37 R11.2
NetP4_6: P4.6 R12.2 | length 163.2
  Bottom Layer w10: P4.6 5170.63,4189.37 R12.2
NetP4_7: P4.7 R13.2 | length 163.2
  Bottom Layer w10: P4.7 5020.63,4189.37 R13.2
NetP4_8: P4.8 R15.2 | length 163.2
  Bottom Layer w10: P4.8 4870.63,4189.37 R15.2
NetP4_9: P4.9 R16.2 | length 163.2
  Bottom Layer w10: P4.9 4720.63,4189.37 R16.2
NetP4_10: P4.10 R18.2 | length 163.2
  Bottom Layer w10: P4.10 4570.63,4189.37 R18.2
NetP5_3: P5.3 R21.2 | length 247.1
  Top Layer w10: R21.2 4550,2230 P5.3@4560,2220
NetP5_4: P5.4 R22.2 | length 247.8
  Top Layer w10: R22.2 4700,2230 P5.4@4710,2220 ; R22.2@4701.97,2462.91 R22.2@4701.97,2463.07 ; R22.2@4702.44,2462.91 R22.2@4702.44,2463.54
NetP5_5: P5.5 R23.2 | length 216.9
  Top Layer w10: P5.5@4851.97,2244.09 R23.2@4851.97,2460.94
NetP5_6: P5.6 R24.2 | length 219
  Top Layer w10: P5.6@5002.44,2244.57 R24.2@5002.44,2463.54
NetP5_7: P5.7 R26.2 | length 219
  Top Layer w10: P5.7@5151.97,2244.09 R26.2@5151.97,2463.07
NetP5_8: P5.8 R27.2 | length 219
  Top Layer w10: P5.8@5302.44,2244.57 R27.2@5302.44,2463.54
NetP5_9: P5.9 R29.2 | length 219
  Top Layer w10: P5.9@5451.97,2244.09 R29.2@5451.97,2463.07
NetP5_10: P5.10 R31.2 | length 219.6
  Top Layer w10: P5.10@5601.97,2244.09 5602.44,2244.57 R31.2@5602.44,2463.54
NetP9_1: P9.1 VT1.4 | length 413
  Bottom Layer w40: P9.1 1584.33,2780 VT1.4
NetP10_2: P10.2 R39.1 | length 329.2
  Top Layer w10: P10.2 1600,3840 R39.1
NetP10_3: P10.3 R37.1 | length 341.6
  Top Layer w10: P10.3 1630,3720 R37.1
NetP10_4: P10.4 R36.1 | length 354
  Top Layer w10: P10.4 1660,3600 R36.1
NetP10_5: P10.5 R35.1 | length 366.5
  Top Layer w10: P10.5 1452.91,3230 R35.1
NetP11_3: P11.3 R42.2 | length 92.9
  Top Layer w10: P11.3 R42.2
NetP11_4: P11.4 R43.2 | length 92.9
  Top Layer w10: P11.4 R43.2
OUT_1: DD1.13 DD3.2 | length 3150.6
  Top Layer w10: DD1.13 3606.3,2869.64 3718.26,2757.68 5012.32,2757.68 5092.32,2677.68 5435.75,2677.68 5467.15,2646.29 5676.29,2646.29 v1(5680,2650)
  Bottom Layer w10: DD3.2 5675,3298.36 5646.64,3270 5618.28,3270 5550,3201.72 5550,2931.42 5660,2821.42 5660,2736.57 5670,2726.57 5670,2660 v1(5680,2650)
OUT_2: DD1.14 DD3.3 | length 2991.9
  Top Layer w10: DD1.14 3637.8,2866.42 3726.54,2777.68 5020.61,2777.68 5100.61,2697.68 5444.04,2697.68 5475.43,2666.29 5596.29,2666.29 v1(5630,2700)
  Bottom Layer w10: DD3.3 5624.14,3334.1 5624.14,3304.14 5530,3210 5530,2923.14 5640,2813.14 5640,2753.43 5630,2743.43 v1(5630,2700)
OUT_3: DD1.15 DD3.4 | length 2883
  Top Layer w10: DD1.15 3669.29,2863.21 3734.83,2797.68 5028.89,2797.68 5108.89,2717.68 5452.32,2717.68 5483.71,2686.29 5536.29,2686.29 v1(5560,2710)
  Bottom Layer w10: v1(5560,2710) 5568.28,2710 5620,2761.72 5620,2804.85 5510,2914.85 5510,3218.28 5575,3283.28 DD3.4
OUT_4: DD1.16 DD3.5 | length 2779.9
  Top Layer w10: DD1.16 3700.79,2860 3743.11,2817.68 5037.18,2817.68 5117.18,2737.68 5492.32,2737.68 v1(5500,2730)
  Bottom Layer w10: v1(5500,2730) 5520,2750 5580,2750 5600,2770 5600,2796.57 5490,2906.57 5490,3226.57 5525,3261.57 DD3.5
OUT_5: DD1.17 DD3.6 | length 2523.8
  Top Layer w10: DD1.17 3844.91,3110.24 4117.47,2837.68 5045.46,2837.68 5125.46,2757.68 5471.11,2757.68 5483.43,2770 5530,2770 v1(5550,2790)
  Bottom Layer w10: DD3.6 5470,3329.96 5470,2890 5550,2810 v1(5550,2790)
OUT_6: DD1.18 DD3.7 | length 2480.3
  Top Layer w10: DD1.18 3841.7,3141.73 4125.75,2857.68 5053.74,2857.68 5133.74,2777.68 5462.82,2777.68 5475.15,2790 5490,2790 5510,2810 v1(5490,2810)
  Bottom Layer w10: DD3.7 5425,3280 5450,3255 5450,2881.72 5490,2841.72 v1(5490,2810)
OUT_7: DD1.19 DD3.8 | length 2360.9
  Top Layer w10: DD1.19 3838.49,3173.23 4134.04,2877.68 5062.03,2877.68 5142.03,2797.68 5397.68,2797.68 v1(5420,2820)
  Bottom Layer w10: DD3.8 5375,3295 5430,3240 5430,2830 v1(5420,2820)
OUT_8: DD1.42 DD3.9 | length 2383.7
  Top Layer w10: DD1.42 3417.32,3602.68 3448.82,3571.18 3488.82,3571.18 v1(3490,3570)
  Bottom Layer w10: v1(3490,3570) 3506.86,3570 3606.86,3670 5040,3670 5230,3480 5230,3260 5240,3250 5305,3250 5325,3270 DD3.9
OUT_9: DD1.57 DD2.8 | length 2769.6
  Top Layer w10: DD1.57 3390.71,3330.71 v1(3490,3430) ; v1(5170,2970) 5186.89,2986.89 DD2.8@5335.59,2986.89
  Bottom Layer w10: v1(3490,3430) 3510,3450 3644.85,3450 3744.85,3550 4990.29,3550 5110,3430.29 5110,3313.43 5090,3293.43 5090,3241.42 5080,3231.42 5080,3088.58 5120,3048.58 5120,3025.15 5170,2975.15 v1(5170,2970)
OUT_10: DD1.56 DD2.9 | length 2815
  Top Layer w10: DD1.56 3163.39,3360 3340,3360 v1(3410,3430) ; v1(5230,2930) 5236.89,2936.89 DD2.9@5335.59,2936.89
  Bottom Layer w10: v1(3410,3430) 3410,3440 3430,3460 3456.57,3460 3466.57,3470 3636.57,3470 3736.57,3570 4998.58,3570 5130,3438.58 5130,3305.15 5110,3285.15 5110,3233.14 5100,3223.14 5100,3096.86 5140,3056.86 5140,3033.43 5163.43,3010 5190,3010 5230,2970 v1(5230,2930)
PDI: DD1.2 DD5.1 P7.1 | length 1858.9
  Top Layer w10: DD5.1 2843.5,2675.2 2935.2,2675.2 v1(2940,2680) 2962.64,2680 2994.54,2711.89 3027.67,2711.89 3069.57,2670 3211.72,2670 3259.84,2718.13 DD1.2
  Bottom Layer w10: P7.1 2119.29,2307.54 2528.91,2717.17 2624.84,2717.17 2625.15,2716.85 2669.99,2716.85 2670.3,2717.17 2902.83,2717.17 v1(2940,2680)
PDO: DD1.3 DD5.4 P7.9 | length 2409.7
  Top Layer w10: v1(2600,2800) 2608.27,2791.73 v1(2608.27,2677.17) 2675.79,2677.17 DD5.4 ; v1(3011.11,2671.89) 3033,2650 3230,2650 3291.34,2711.34 DD1.3
  Bottom Layer w10: P7.9 1743.99,2264.57 1798.99,2319.57 1841.28,2319.57 1881.28,2359.57 2086.46,2359.57 2504.06,2777.17 2577.17,2777.17 v1(2600,2800) ; v1(2608.27,2677.17) 2627.95,2696.85 2873.15,2696.85 2900,2670 2900,2660 2920,2640 2979.21,2640 v1(3011.11,2671.89)
RES: C1.2 DD1.20 P7.5 R25.2 | length 3055.5
  Top Layer w10: DD1.20 3835.28,3204.72 3925.83,3114.17 C1.2 4080.71,3114.17 R25.2 v1(4084.65,3050)
  Bottom Layer w10: P7.5 1919.29,2278.86 1960,2319.57 2103.03,2319.57 2520.63,2737.17 2633.12,2737.17 2633.44,2736.85 2661.7,2736.85 2662.02,2737.17 3680,2737.17 3712.83,2770 4040,2770 4084.65,2814.65 v1(4084.65,3050)
ROTATION: DD1.31 DD2.3 | length 1795.5
  Top Layer w10: DD1.31 3811.75,3551.18 3830,3532.93 3830,3503.43 3863.43,3470 3980,3470 v1(3990,3480) ; v1(5070,3350) 5160,3350 5170,3340 5170,3321.72 5256.72,3235 DD2.3
  Bottom Layer w10: v1(3990,3480) 4010,3480 4040,3510 4971.72,3510 5030,3451.72 5030,3390 v1(5070,3350)
RS: DD1.48 P3.4 | length 1757
  Top Layer w10: P3.4 1906.22,4292.52 1931.3,4317.6 2130.96,4317.6 2157.22,4291.34 2157.22,4135.56 2592.78,3700 3220,3700 3228.35,3691.65 DD1.48
RXD1: DD1.27 P6.4 | length 851.3
  Top Layer w10: DD1.27 3770.55,3430 3955.15,3430 3965.15,3420 4021.72,3420 4040,3401.72 4040,3373.43 4063.43,3350 4096.57,3350 4140,3393.43 v1(4140,3410)
  Bottom Layer w10: v1(4140,3410) 4130,3400 4150,3380 4497.32,3380 P6.4
TXD1: DD1.28 P6.3 | length 826.9
  Top Layer w10: DD1.28 3848.45,3456.69 3855.15,3450 3963.43,3450 3973.43,3440 4030,3440 v1(4080,3390)
  Bottom Layer w10: v1(4080,3390) 4110,3360 4455.77,3360 4498.03,3317.74 P6.3
TXDE: DD1.4 DD5.2 DD5.3 | length 998.2
  Top Layer w10: DD5.3 DD5.2 2783.66,2650 2803.66,2630 3238.28,2630 3322.83,2714.55 DD1.4
VCC: C5.2 C6.2 C8.1 C9.1 C13.2 C14.2 C15.2 C16.2 C17.2 C18.2 C19.2 C20.2 C21.2 C22.2 C23.2 C24.2 DA1.3 DD1.21 DD1.52 DD2.20 DD3.20 DD4.20 DD5.8 P1.1 P1.2 P2.6 P3.1 P4.1 P4.2 P5.1 P5.2 P6.1 P7.2 P8.1 P10.6 P11.1 R14.1 R19.1 R20.1 R25.1 R30.2 R32.2 R38.2 R40.2 R41.2 VD1.2 VD2.2 | length 20307.2
  Top Layer w10: P3.1@1806.22,4143.78 P3.1 ; C5.2 C20.2 2597.24,2535.43 2631.81,2570 2720,2570 2760,2530 2820,2530 2833.66,2516.34 DD5.8 ; C16.2 3059.05,3500 3070.87,3488.19 DD1.52 3226.51,3488.19 v1(3250,3464.7) ; C14.2 3574.57,2174.57 3595,2195 DD4.20 ; DD1.21 3873.78,3236.22 v1(3900,3210) 3959.96,3150.04 4055.55,3150.04 4084.65,3179.13 R25.1 R25.1@4080.71,3192.91 ; DD2.20@5705.67,3336.89 5753.11,3336.89 5760,3343.78 5760,3420 C22.2@5742.72,3437.28
  Top Layer w40: P10.6 1540,3080 1700,3240 1700,3310 1730,3340 C8.1@1760.15,3340 ; v1(2100,4010) 2120,3990 R38.2 ; P7.2 2482.28,2164.57 P8.1 2465.59,2224.41 2390,2300 2390,2500 2425.43,2535.43 C5.2 2483.07,2813.07 2620.63,2950.63 2820.63,2950.63 R30.2 2814.57,3056.06 C6.2 ; C24.2 C16.2 ; C14.2 3594.57,2100 4100,2100 4230,2230 P5.1 P5.2 ; R25.1@4080.71,3192.91 C15.2 ; C9.1 4515.43,3750 C19.2 4894.57,3754.57 4960,3820 v1(5730,3820) ; P6.1@4495.43,3078.11 P6.1@4498.03,3078.11 ; P6.1 4596.14,3080.71 C21.2 4604.57,3080 P11.1 R41.2 R40.2 ; C22.2 5745.43,3804.57 v1(5730,3820) ; P4.1 P4.2 5730,4150 v1(5730,3820) ; P1.1 P1.2
  Bottom Layer w10: P8.1 2581.5,2263.78 R32.2 2537.17,2322.83 2500,2360 2500,2430 2528.66,2458.66 VD1.2 2616.93,2500 2790,2500 2831.34,2458.66 VD2.2 ; 3316.15,4043.85 3392.31,4120 3392.31,4211.6 P2.6 ; DD3.20 v1@5725,3820 ; P4.1@5920,4180 P4.1@5920.63,4180
  Bottom Layer w40: C17.2 1653.07,4153.54 R14.1 1797.17,4153.54 P3.1 1920,4048.82 2061.18,4048.82 v1(2100,4010) 2034.09,3944.09 2034.09,3494.09 ; C8.1 C23.2@1880,3340 ; C23.2 1985.43,3335.43 ; DA1.3 2064.33,3256.54 1985.43,3335.43 ; R19.1 R20.1 2714.33,4145.67 2790,4070 3062.13,4070 C18.2 3149.61,4102.06 3181.67,4070 3281.57,4070 3331.57,4020 3331.57,3590 3250,3508.43 v1(3250,3464.7) 3139.4,3464.7 3110,3494.09 2854.33,3494.09 ; P5.1 P5.2 4410,2320 ; v1(5730,3820) 5760,3820 5795.43,3784.57 C13.2 5795.43,2864.57 6110,2550 P1.2 P1.1 6040,2400 5990,2450 4540,2450 4410,2320 ; P4.2 P4.1 ; 1985.43,3335.43 2034.09,3384.09 2034.09,3494.09 ; 2034.09,3494.09 2854.33,3494.09 ; 2854.33,3494.09 2854.33,2984.33 v1(2820,2950) 2850,2920 3570,2920 3860,3210 v1(3900,3210) 4140,3210 4269.29,3080.71 P6.1 4498.03,2918.03 4410,2830 4410,2320
VCC+12V: C10.1 C11.2 C12.2 DA1.1 VT1.3 | length 1115.9
  Bottom Layer w40: C11.2 C12.2 2059.72,3025.43 DA1.1 2129.96,3030.04 2200,2960 2200,2550 2150.04,2500.04 VT1.3
VERTICAL: DD1.32 DD2.2 | length 1754
  Top Layer w10: DD1.32 3817.32,3582.68 v1(3890,3510) ; v1(5070,3410) 5160,3410 5190,3380 5190,3330 5235,3285 DD2.2
  Bottom Layer w10: v1(3890,3510) 3900,3510 3920,3530 4980,3530 5070,3440 v1(5070,3410)
XTL1: C2.2 DD1.24 Y1.2 | length 653.3
  Top Layer w10: DD1.24 3765.75,3330 3766.46,3330.71 3824.44,3330.71 3825.15,3330 4156.77,3330 Y1.2 4248.03,3421.26 C2.2
XTL2: C7.2 DD1.23 Y1.1 | length 817
  Top Layer w10: DD1.23 3850,3299.21 3858.5,3307.72 4123.39,3307.72 4222.44,3208.66 Y1.1 4248.03,3035.43 C7.2
pads on no net: C1.0 C2.0 C3.0 C4.0 C5.0 C6.0 C7.0 C8.0 C9.0 C10.0 C11.0 C12.0 C13.0 C14.0 C15.0 C16.0 C17.0 C18.0 C19.0 C20.0 C21.0 C22.0 C23.0 C24.0 DA1.0 DD1.1 DD1.43 DD5.0 LD1.0 P2.0 P3.0 P3.7 P3.8 P3.9 P3.10 P7.0 P7.3 R1.0 R2.0 R3.0 R4.0 R5.0 R6.0 R7.0 R8.0 R9.0 R10.0 R11.0 R12.0 R13.0 R14.0 R15.0 R16.0 R17.0 R18.0 R19.0 R20.0 R21.0 R22.0 R23.0 R24.0 R25.0 R26.0 R27.0 R28.0 R29.0 R30.0 R31.0 R32.0 R33.0 R34.0 R35.0 R36.0 R37.0 R38.0 R39.0 R40.0 R41.0 R42.0 R43.0 VD1.0 VD2.0 VT1.0 Y1.0

## Polygon pours and split planes (outlines as drawn)
GND on Bottom Layer "Top Layer-No Net 1" (solid, remove dead copper, pour order 4): 1182.13,4450.04 1182.13,1969.73 6497.09,1969.73 6497.09,4450.04
GND on Top Layer "Top Layer-No Net 1" (solid, remove dead copper, pour order 3): 1191.68,4441.53 1191.68,1961.21 6506.64,1961.21 6506.64,4441.53

## Keep-outs
Keep-Out Layer:
  the board outline again, w78.74

## Silkscreen, mask and mechanical layers (free items; w line width, h text height)
Top Overlay:
  text "GND" at 4290,4340 h39.37
  text "O8" at 4530,4340 h39.37
  text "O7" at 4680,4340 h39.37
  text "O6" at 4820,4340 h39.37
  text "O5" at 4970,4340 h39.37
  text "O4" at 5130,4340 h39.37
  text "O3" at 5270,4340 h39.37
  text "O2" at 5420,4340 h39.37
  text "O1" at 5590,4340 h39.37
  text "VCC" at 5800,4340 h39.37
  text "GND" at 6430,3920 h39.37 r90
  text "GND" at 1250,3880 h39.37 r270
  text "AI4" at 1250,3720 h39.37 r270
  text "O12" at 6440,3690 h39.37 r90
  text "UControl_Module" at 2197.1,3680.57 h59.06
  text "AI3" at 1250,3580 h39.37 r270
  text "I12" at 6440,3550 h39.37 r90
  text "CHM v4.19" at 2200,3480 h59.06
  text "AI2" at 1250,3430 h39.37 r270
  text "O11" at 6440,3400 h39.37 r90
  text "AI1" at 1250,3270 h39.37 r270
  text "I11" at 6440,3260 h39.37 r90
  text "VCC" at 1250,3130 h39.37 r270
  text "PCB v3.8" at 2290,3120 h59.06
  text "O10" at 6440,3090 h39.37 r90
  text "I10" at 6440,2950 h39.37 r90
  text "O9" at 6440,2810 h39.37 r90
  text "I9" at 6440,2660 h39.37 r90
  text "~" at 4865,2450 h39.37 r180
  text "~" at 5020,2450 h39.37 r180
  text "~" at 5165,2450 h39.37 r180
  text "(~)" at 4740,2430 h39.37 r180
  text "VCC" at 6440,2420 h39.37 r90
  text "VCC" at 4260,2030 h39.37
  text "I1" at 4520,2030 h39.37
  text "I2" at 4670,2030 h39.37
  text "I3" at 4830,2030 h39.37
  text "I4" at 4980,2030 h39.37
  text "I5" at 5120,2030 h39.37
  text "I6" at 5270,2030 h39.37
  text "I7" at 5430,2030 h39.37
  text "I8" at 5580,2030 h39.37
  text "GND" at 5770,2030 h39.37

## Text inside footprints (layer, text, board x,y; h text height)
C8: Top Overlay "+" at 1750,3440 h27.56 r270
C9: Top Overlay "+" at 4440,3650 h27.56 r90
C10: Top Overlay "+" at 1750,3130 h27.56 r270
P2: Top Overlay "13" at 3822.31,4057.6 h27.56; Top Overlay "14" at 3863.59,4382.6 h27.56 r180; Top Overlay "1" at 3239.74,4057.6 h27.56; Top Overlay "2" at 3253.31,4382.6 h27.56 r180
P3: Top Overlay "2" at 1816.22,4382.6 h27.56 r180; Top Overlay "1" at 1802.65,4057.6 h27.56; Top Overlay "16" at 2526.5,4382.6 h27.56 r180; Top Overlay "15" at 2485.22,4057.6 h27.56
P7: Top Overlay "9" at 1740.29,2369.57 h27.56 r180; Top Overlay "10" at 1699.01,2044.57 h27.56; Top Overlay "1" at 2122.86,2369.57 h27.56 r180; Top Overlay "2" at 2109.29,2044.57 h27.56